# Altium PCB my-cnc_v2.PcbDoc
Units mm, origin at the board's own origin, x right, y up, seen from the top; angles counter-clockwise.
Board outline 65 x 100 mm, 2 copper layers (Top Layer, Bottom Layer); 47 components, 60 nets, 294 pads, 66 vias.
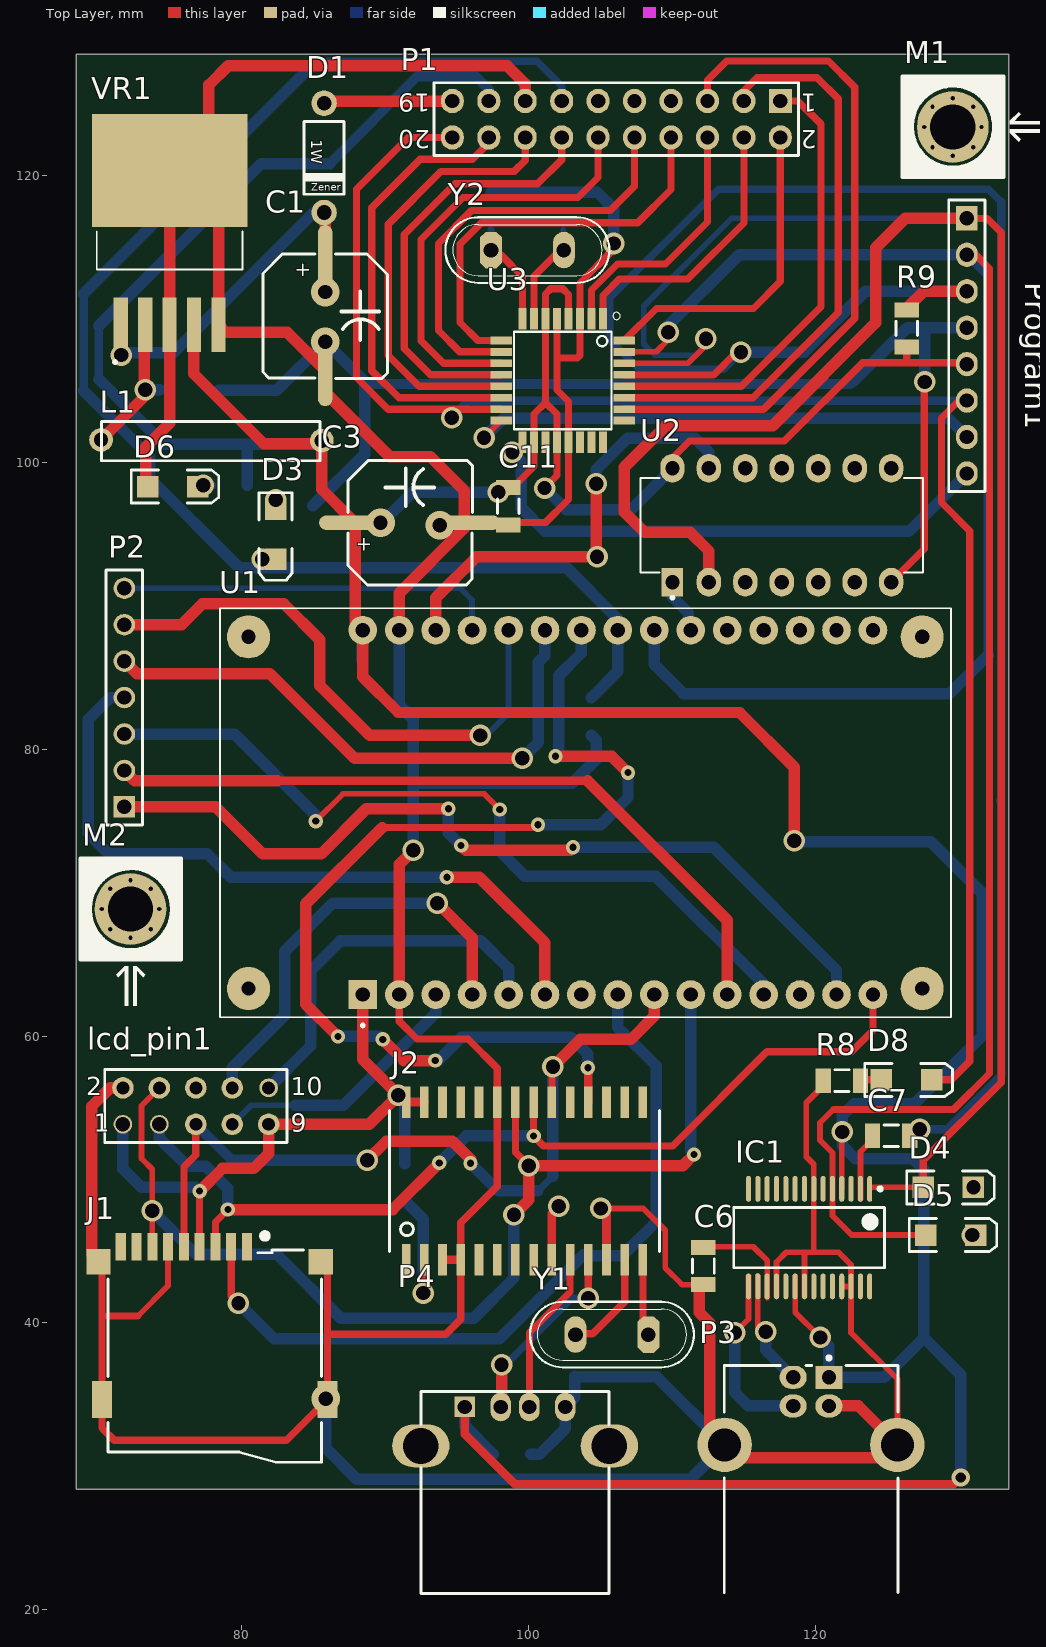
[diagram p0: Top Layer view]
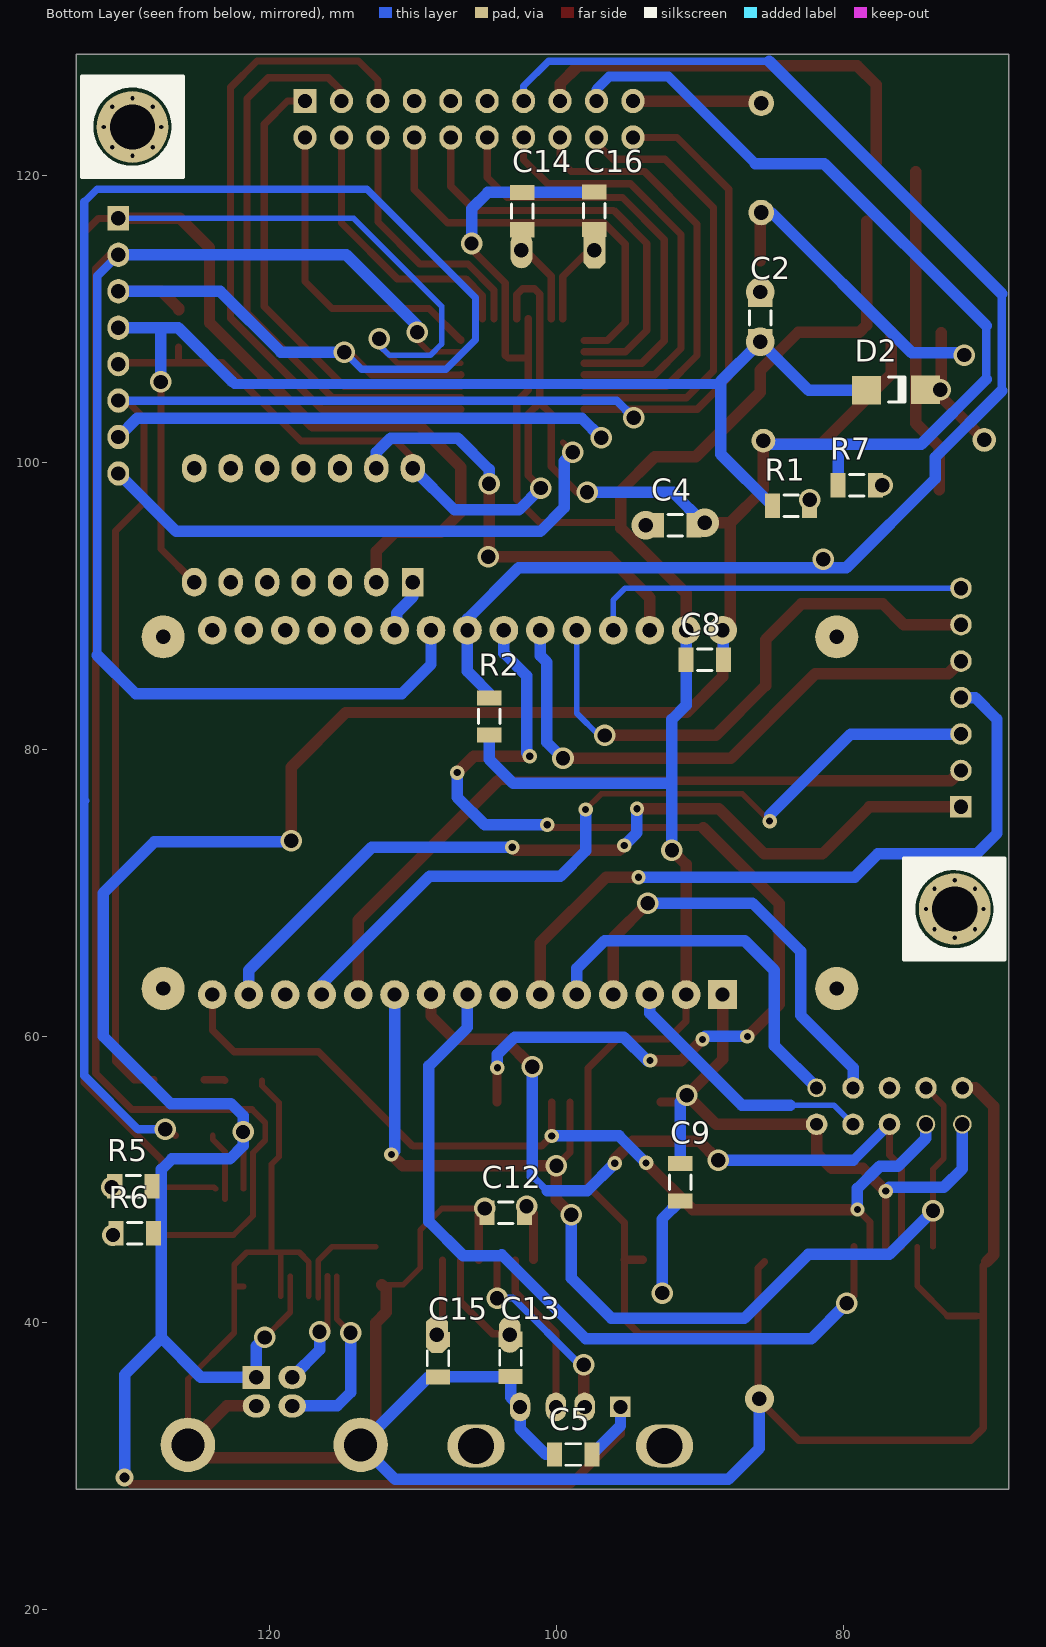
[diagram p1: Bottom Layer view, seen from below]
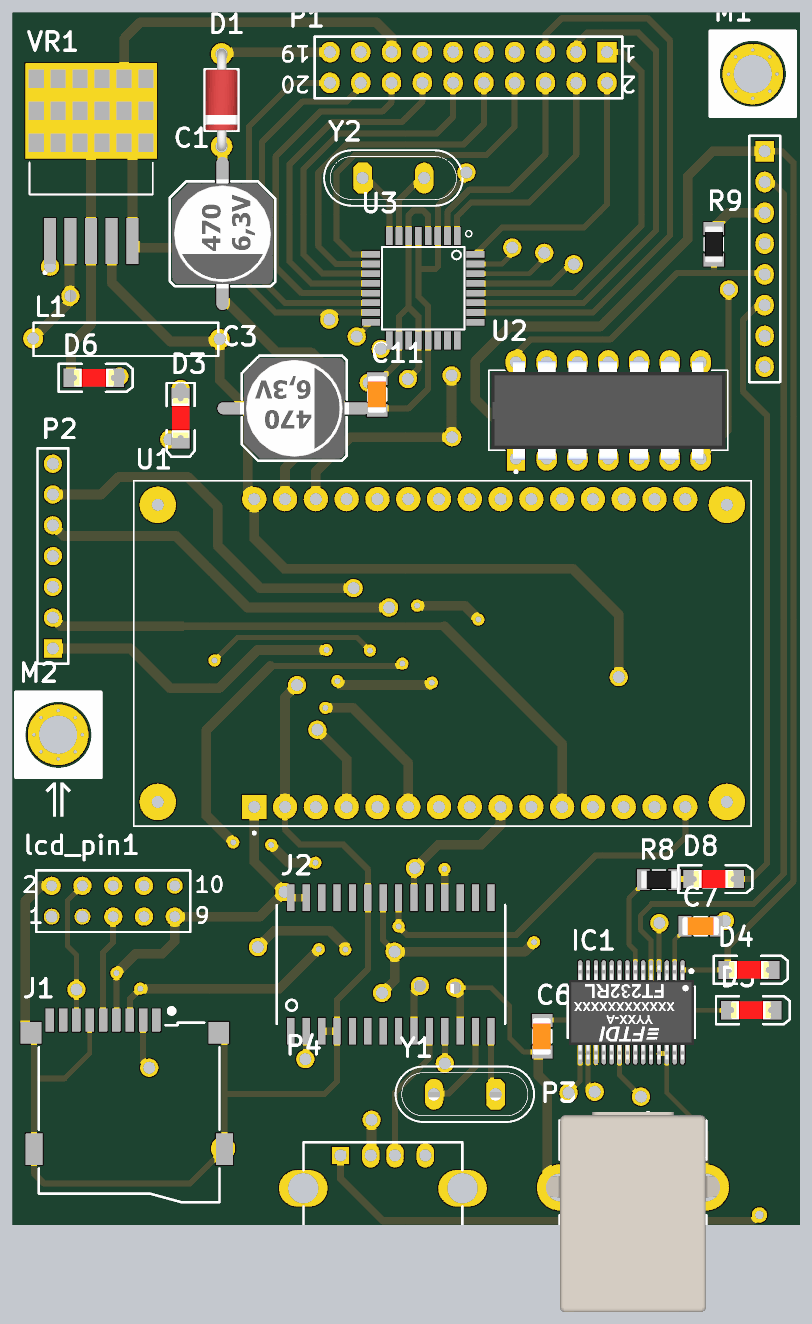
[diagram p2: 3D render of the assembled board from above, using the file's embedded part models]
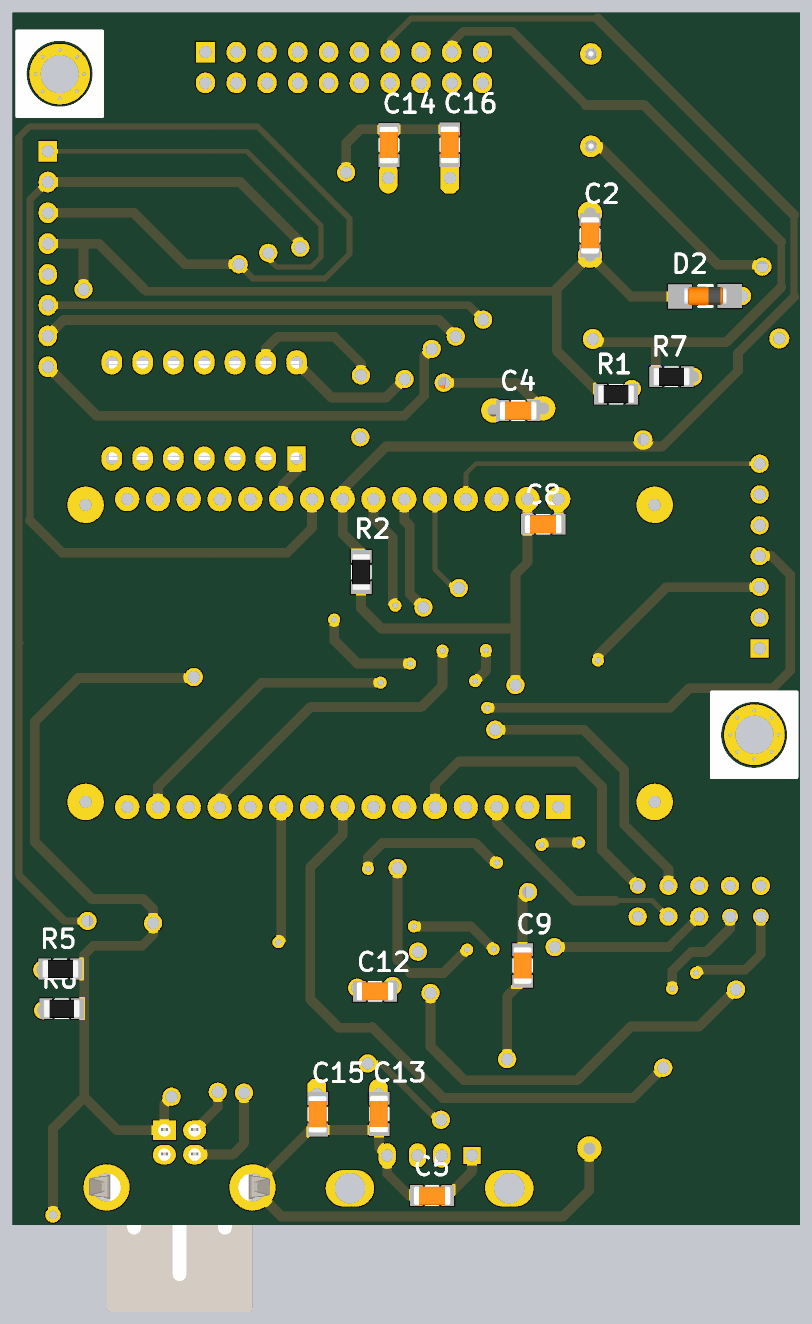
[diagram p3: 3D render of the assembled board from below, using the file's embedded part models]

## Layer stack, top to bottom
Top Solder: solder mask 0.0102, Solder Resist, Dk 3.5
Top Layer: signal copper 0.0356
Dielectric 1: dielectric 0.32, FR-4, Dk 4.8
Bottom Layer: signal copper 0.0356
Bottom Solder: solder mask 0.0102, Solder Resist, Dk 3.5

## Board outline
68.46,28.422 133.46,28.422 133.46,128.422 68.46,128.422

## Design rules (kind name [scope] priority, off if disabled: settings)
Clearance [All] p1: gap=0.2 ignorepadtopadclearanceinfootprint=FALSE
PolygonConnect [All] p1: connectstyle=Relief reliefconductorwidth=0.254 reliefentries=4 polygonreliefangle="90 Angle" airgapwidth=0.254
RoutingVias [All] p1: holewidth=0.711 width=1.27 viastyle="Through Hole" minholewidth=0.711 minwidth=1.27 maxholewidth=0.711 maxwidth=1.27
SolderMaskExpansion [All] p1: expansion=0.102
Width [All] p1: maxlimit=0.8 minlimit=0.4 preferedwidth=0.5
30 further rules are at their usual default settings.

## Components (designator, comment, footprint, x,y, rotation, side; value= is the part's Value field where it differs from the comment)
C1 "1uF" "CAP SMD 470uF" 85.801,110.211 r90 top
C2 "100nF" SMD_CAP_1206 85.801,108.758 r90 bottom
C3 "1uF" "CAP SMD 470uF" 91.694,95.783 r180 top
C4 "100nF" SMD_CAP_1206 93.02,95.606 r180 bottom
C5 "100nF" SMD_CAP_1206 100.127,30.836 r180 bottom
C6 "100nF" SMD_CAP_1206 112.166,45.268 r270 top
C7 "100nF" SMD_CAP_1206 126.548,53.061 r180 top
C8 "100nF" SMD_CAP_1206 90.963,86.233 r180 bottom
C9 "100nF" SMD_CAP_1206 91.364,48.514 r90 bottom
C11 "100nF" SMD_CAP_1206 98.552,98.227 r270 top
C12 "100nF" SMD_CAP_1206 102.235,47.676 r0 bottom
C13 "100nF" SMD_CAP_1206 103.2,38.867 r270 bottom
C14 "100nF" SMD_CAP_1206 102.387,118.796 r270 bottom
C15 "100nF" SMD_CAP_1206 108.255,38.842 r270 bottom
C16 "100nF" SMD_CAP_1206 97.358,118.821 r270 bottom
D1 "Diode Zener" "Diode 1W" 85.725,121.209 r270 top
D2 "1N4148" "Diode 1n4148 SMD" 77.902,105.054 r180 bottom
D3 "SMD 1206 LED" "LED 1206" 82.347,94.971 r270 top
D4 "SMD 1206 LED" "LED 1206" 129.235,49.454 r0 top
D5 "SMD 1206 LED" "LED 1206" 129.413,46.126 r0 top
D6 "SMD 1206 LED" "LED 1206" 75.184,98.298 r0 top
D8 "SMD 1206 LED" "LED 1206" 126.314,56.947 r0 top
IC1 "FT232RL" SSOP-28_L 119.532,45.949 r270 top
J1 "693071020811" 693071020811 78.102,34.265 r0 top
J2 "CH376S" SOP28 98.425,49.899 r0 top
L1 "Inductor Iron" AXIAL-0.9 77.826,101.498 r0 top value=10mH
lcd_pin1 "Header 5X2" HDR2X5 71.704,53.848 r0 top
M1 "Screw" "Board Screw" 129.548,123.36 r90 top
M2 "Screw" "Board Screw" 72.238,68.853 r0 top
P1 "Header 10X2" HDR2X10 117.526,125.171 r180 top
P2 "Header 7" HDR1X7 71.806,75.971 r90 top
P3 "USB Connector" USB2.5-2H4F 120.915,36.214 r270 top
P4 "USB-A1HSW6" OST_USB-A1HSW6 99.035,27.635 r0 top
Program1 "Header 8" HDR1X8 130.531,116.992 r270 top
R1 "1K" "RES 1206 (3216X08L)" 82.347,96.952 r0 bottom
R2 "1K" "RES 1206 (3216X08L)" 104.673,80.975 r90 bottom
R5 "1K" "RES 1206 (3216X08L)" 128.189,49.53 r0 bottom
R6 "1K" "RES 1206 (3216X08L)" 128.087,46.253 r0 bottom
R7 "1K" "RES 1206 (3216X08L)" 80.371,98.4 r180 bottom
R8 "1K" "RES 1206 (3216X08L)" 120.518,56.896 r0 top
R9 "1K" "RES 1206 (3216X08L)" 126.34,108.021 r90 top
U1 "ESP32-DEVKIT-V1" MODULE_ESP32_DEVKIT_V1 103.937,75.59 r90 top
U2 "CD4066BE" DIP794W45P254L1969H508Q14 117.627,95.606 r90 top
U3 "ATMEGA328P-15AZ" QFP80P900X900X120-32N 102.362,105.689 r270 top
VR1 "LM2596S-5.0" TO170P1524X483-6N 74.957,115.976 r90 top
Y1 "6 MHz" My_Crystal 105.791,39.192 r180 top
Y2 "6 MHz" My_Crystal 99.898,114.783 r0 top

## Footprints (in the part's own frame and the unit in brackets; to place one, negate y for a bottom-side part, rotate by r counter-clockwise, add the part's x,y. Pads: shape width x height; smd on the part's side, far side on the other; paste and mask are expansions set on the pad)
693071020811 [mm]
  rect 0.7x1.9 smd: 1(2.25,11.05) 2(1.15,11.05) 3(0.05,11.05) 4(-1.05,11.05) 5(-2.15,11.05) 6(-3.25,11.05) 7(-4.35,11.05) 8(-5.45,11.05) 9(-6.55,11.05)
  rect 1.7x1.8 smd: 10(-8.1,10) 11(7.4,10)
  rect 1.4x2.6 smd: 12(-7.85,0.4) 13(7.85,0.4)
  silkscreen extent -7.45,-3.97 7.45,12
AXIAL-0.9 [mm] "Axial Device, Thru-Hole; 2 Leads; 0.9 in Pin Spacing"
  round 1.65 hole 1: 1(-7.645,0.051) 2(7.747,0)
  silkscreen extent -7.62,-1.4 7.62,1.35
"Board Screw" [mm]
  round 0.6 hole 0.3: S(-2,0) S(-1.414,-1.414) S(-1.414,1.414) S(0,2) S(0,-2) S(1.414,-1.414) S(1.414,1.414) S(2,0)
  round 5 hole 3.15 mask+0.1: S(0,0)
  silkscreen extent -3.49,-6.75 3.56,3.52
"CAP SMD 470uF" [mm] "SMD CAP 470uF"
  oval 5x1 smd: 1(3.81,0) 2(-3.81,0)
  silkscreen extent -4.37,-4.34 4.29,4.34, body extent -4.53,-4.15 4.47,4.15, height 12
"Diode 1n4148 SMD" [mm] "Mini MELF SOD-80"
  rect 2x2 smd: 1(-0.483,-0.051) 2(3.632,0)
  silkscreen extent 1.04,-0.87 2.22,0.88, body extent -0.13,-0.75 3.37,0.75, height 1.55
"Diode 1W" [mil]
  round 70 hole 40: 1(-150,0) 2(150,0)
  silkscreen extent -100,-55 100,55, body extent -166,-53 165,53, height 131
DIP794W45P254L1969H508Q14 [mm]
  rect 2x1.5 hole 1: 1(-3.97,7.62)
  oval 2x1.7 hole 1: 2(-3.97,5.08) 3(-3.97,2.54) 4(-3.97,0) 5(-3.97,-2.54) 6(-3.97,-5.08) 7(-3.97,-7.62) 8(3.97,-7.62) 9(3.97,-5.08) 10(3.97,-2.54) 11(3.97,0) 12(3.97,2.54) 13(3.97,5.08) 14(3.97,7.62)
  silkscreen extent -5.15,-9.84 3.3,9.84, body extent -4.1,-9.65 4.1,9.65, height 5.08
HDR1X7 [mm] "Connector; Header; 7 Position"
  rect 1.5x1.5 hole 1: 1(0,0)
  round 1.5 hole 1: 2(2.54,0) 3(5.08,0) 4(7.62,0) 5(10.16,0) 6(12.7,0) 7(15.24,0)
  silkscreen extent -1.27,-1.27 16.51,1.27
HDR1X8 [mm] "Connector; Header; 8 Position"
  rect 1.7x1.5 hole 1: 1(0,0)
  oval 1.7x1.5 hole 1: 2(2.54,0) 3(5.08,0) 4(7.62,0) 5(10.16,0) 6(12.7,0) 7(15.24,0) 8(17.78,0)
  silkscreen extent -1.27,-1.27 19.05,1.27
HDR2X5 [mm] "Connector; Header; 5x2 Position"
  round 1.3 hole 1: 1(0,0) 3(2.54,0)
  round 1.5 hole 0.9: 2(0,2.54) 4(2.54,2.54) 5(5.08,0) 6(5.08,2.54) 7(7.62,0) 8(7.62,2.54) 9(10.16,0)
  round 1.3 hole 0.9: 10(10.16,2.54)
  silkscreen extent -1.27,-1.27 11.43,3.81
HDR2X10 [mm] "Connector; Header; 10x2 Position"
  rect 1.6x1.7 hole 1: 1(0,0)
  oval 1.6x1.7 hole 1: 2(0,2.54) 3(2.54,0) 4(2.54,2.54) 5(5.08,0) 6(5.08,2.54) 7(7.62,0) 8(7.62,2.54) 9(10.16,0) 10(10.16,2.54) 11(12.7,0) 12(12.7,2.54) 13(15.24,0) 14(15.24,2.54) 15(17.78,0) 16(17.78,2.54) 17(20.32,0) 18(20.32,2.54) 19(22.86,0) 20(22.86,2.54)
  silkscreen extent -1.27,-1.27 24.13,3.81
"LED 1206" [mm]
  rect 1.5x1.5 smd: 1(-1.75,0) 2(1.75,0)
  silkscreen extent -2.9,-1.15 3.2,1.15, body extent -1.65,-0.72 1.65,0.73, height 1.36
MODULE_ESP32_DEVKIT_V1 [mm]
  rect 2x2 / inner round 2 / far side rect 2x2 hole 1: 1(-12.7,15.515)
  round 2 hole 1: 2(-12.7,12.975) 3(-12.7,10.435) 4(-12.7,7.895) 5(-12.7,5.355) 6(-12.7,2.815) 7(-12.7,0.275) 8(-12.7,-2.265) 9(-12.7,-4.805) 10(-12.7,-7.345) 11(-12.7,-9.885) 12(-12.7,-12.425) 13(-12.7,-14.965) 14(-12.7,-17.505) 15(-12.7,-20.045) 16(12.7,-20.045) 17(12.7,-17.505) 18(12.7,-14.965) 19(12.7,-12.425) 20(12.7,-9.885) 21(12.7,-7.345) 22(12.7,-4.805) 23(12.7,-2.265) 24(12.7,0.275) 25(12.7,2.815) 26(12.7,5.355) 27(12.7,7.895) 28(12.7,10.435) 29(12.7,12.975) 30(12.7,15.515)
  round 3 hole 1 unplated: ""(-12.28,23.475) ""(-12.28,-23.475) ""(12.23,23.475) ""(12.23,-23.475)
  silkscreen extent -14.95,-25.48 14.23,25.48
My_Crystal [mil]
  oct 60x100 hole 40: 1(-100,0)
  oval 60x100 hole 40: 2(100,0)
  silkscreen extent -225,-90 225,90
OST_USB-A1HSW6 [mm]
  rect 1.428x1.428 / inner round 1.428 / far side rect 1.428x1.428 hole 1: 1(-3.5,6.51)
  oval 1.428x2 hole 1: 2(-1,6.51) 3(1,6.51) 4(3.5,6.51)
  oval 4x3 hole 2.5 unplated: ""(-6.57,3.8) ""(6.57,3.8)
  silkscreen extent -6.55,-6.5 6.55,7.6
QFP80P900X900X120-32N [mm]
  rect 1.5x0.55 smd: 1(-4.3,2.8) 2(-4.3,2) 3(-4.3,1.2) 4(-4.3,0.4) 5(-4.3,-0.4) 6(-4.3,-1.2) 7(-4.3,-2) 8(-4.3,-2.8) 17(4.3,-2.8) 18(4.3,-2) 19(4.3,-1.2) 20(4.3,-0.4) 21(4.3,0.4) 22(4.3,1.2) 23(4.3,2) 24(4.3,2.8)
  rect 0.55x1.5 smd: 9(-2.8,-4.3) 10(-2,-4.3) 11(-1.2,-4.3) 12(-0.4,-4.3) 13(0.4,-4.3) 14(1.2,-4.3) 15(2,-4.3) 16(2.8,-4.3) 25(2.8,4.3) 26(2,4.3) 27(1.2,4.3) 28(0.4,4.3) 29(-0.4,4.3) 30(-1.2,4.3) 31(-2,4.3) 32(-2.8,4.3)
  silkscreen extent -4.75,-3.4 3.4,4
"RES 1206 (3216X08L)" [mm] "Chip Resistor, 2-Leads, Body 3.2x1.6mm, IPC High Density _ (0.125 W)"
  rect 1.05x1.7 smd: 1(0,0) 2(2.596,0)
  silkscreen extent 0.8,-0.75 1.8,0.75, body extent -0.23,-0.76 2.82,0.76, height 0.6
SMD_CAP_1206 [mm]
  rect 1.05x1.7 smd: 1(0,0) 2(2.596,0)
  silkscreen extent 0.8,-0.75 1.8,0.75, body extent -0.22,-0.77 2.82,0.75, height 0.75
SOP28 [mm]
  rect 0.6x2.2 smd: 1(-6.985,-5.5) 2(-5.715,-5.5) 3(-4.445,-5.5) 4(-3.175,-5.5) 5(-1.905,-5.5) 6(-0.635,-5.5) 7(0.635,-5.5) 8(1.905,-5.5) 9(3.175,-5.5) 10(4.445,-5.5) 11(5.715,-5.5) 12(6.985,-5.5) 13(8.255,-5.5) 14(9.525,-5.5) 15(9.525,5.5) 16(8.255,5.5) 17(6.985,5.5) 18(5.715,5.5) 19(4.445,5.5) 20(3.175,5.5) 21(1.905,5.5) 22(0.635,5.5) 23(-0.635,5.5) 24(-1.905,5.5) 25(-3.175,5.5) 26(-4.445,5.5) 27(-5.715,5.5) 28(-6.985,5.5)
  silkscreen extent -8.15,-4.91 10.69,4.91
SSOP-28_L [mm] "SOP, 28-Leads, Body 10.2x5.3mm, Pitch 0.65mm, IPC High Density"
  oval 1.8x0.35 smd: 1(-3.4,4.225) 2(-3.4,3.575) 3(-3.4,2.925) 4(-3.4,2.275) 5(-3.4,1.625) 6(-3.4,0.975) 7(-3.4,0.325) 8(-3.4,-0.325) 9(-3.4,-0.975) 10(-3.4,-1.625) 11(-3.4,-2.275) 12(-3.4,-2.925) 13(-3.4,-3.575) 14(-3.4,-4.225) 15(3.4,-4.225) 16(3.4,-3.575) 17(3.4,-2.925) 18(3.4,-2.275) 19(3.4,-1.625) 20(3.4,-0.975) 21(3.4,-0.325) 22(3.4,0.325) 23(3.4,0.975) 24(3.4,1.625) 25(3.4,2.275) 26(3.4,2.925) 27(3.4,3.575) 28(3.4,4.225)
  silkscreen extent -3.52,-5.25 2.1,5.25, body extent -3.88,-5.17 3.88,5.17, height 2.16
TO170P1524X483-6N [mm]
  rect 3.79x0.99 smd: 1(-6.4,3.4) 2(-6.4,1.7) 3(-6.4,0) 4(-6.4,-1.7) 5(-6.4,-3.4)
  rect 7.88x10.84 smd paste-6: 6(4.35,0)
  silkscreen extent -9.1,-5.08 0.09,5.08
USB2.5-2H4F [mm] "Connector; USB1.1, Type B, Thru-Hole; 4 Position; Right Angle"
  rect 1.6x1.9 hole 1: 1(0,0)
  oval 1.6x1.9 hole 1: 2(0,-2.5) 3(2,-2.5) 4(2,0)
  round 3.8 hole 2.3: 4(4.71,4.77) 4(4.71,-7.27)
  silkscreen extent -1.47,-7.3 14.99,4.8, body extent -1.5,-8.7 15,6.2, height 10.95

## Part data
C1 C3: library part "Cap ELECTROLITIC TOTAL SIZE", "Cap electrolitic radial", Data=16-12-2016, Designer="Abbas Basereh"
C2 C4 C5 C6 C7 C8 C9 C11 C12 C13 C14 C15 C16: library part Cap-Bipolar, "Bipolar Capacitor", Voltage=100V, Adding Date=1387/12/20, Designer="Saeid Jorablo", Organazation=ControTec
D1: "Zener Diode", Voltage="3.3 V", Company=E.P.I.L, Design Date=2011/11/02, Designer="Saeid Jorablo"
D2: library part "1N4148 SMD", "General Semicoductor"
D3 D4 D5 D6 D8: library part "LED SMD 1206"
IC1: "USB UART Asynchronous Serial Data Transfer Chip, SSOP-28, Tape and Reel", ComponentLink1Description="Manufacturer Link", ComponentLink1URL=http://www.ftdichip.com/Products/ICs/FT232R.htm, ComponentLink2Description=Datasheet, ComponentLink2URL=http://www.ftdichip.com/Support/Documents/DataSheets/ICs/DS_FT232R.pdf, DatasheetVersion="ver 2.07, Jul-2010", PackageDescription="28-Pin Small Outline Package 0.65 mm Pitch", PackageReference=SSOP-28, PackageVersion=2010, Published=19-Aug-2010, Publisher="Altium Limited"
J1: "9 (8 + 1) Position Card Connector Secure Digital - microSD™ Surface Mount, Right Angle Gold", Package=None, Check_prices=https://www.snapeda.com/parts/693071020811/Wurth+Electronics/view-part/?ref=eda, MF="Wurth Electronics", MP=693071020811, SnapEDA_Link=https://www.snapeda.com/parts/693071020811/Wurth+Electronics/view-part/?ref=snap
J2: "File manage control chip. Small outline package of 28-pin", Package=Package, Availability="Not in stock", Check_prices=https://www.snapeda.com/parts/CH376S/WCH/view-part/?ref=eda, MF=WCH, MP=CH376S, Price=None, SnapEDA_Link=https://www.snapeda.com/parts/CH376S/WCH/view-part/?ref=snap
L1: "Magnetic-Core Inductor", LatestRevisionDate=17-Jul-2002, LatestRevisionNote="Re-released for DXP Platform.", PackageDescription="Axial Device, Thru-Hole; 2 Leads; 0.9 in Pin Spacing", PackageReference=AXIAL-0.9, Published=24-Mar-1999, Publisher="Altium Limited"
lcd_pin1: "Header, 5-Pin, Dual row", LatestRevisionDate=17-Jul-2002, LatestRevisionNote="Re-released for DXP Platform.", Publisher="Altium Limited"
M1 M2: library part "Board Screw", "Board Screw With Spacer"
P1: "Header, 10-Pin, Dual row", LatestRevisionDate=17-Jul-2002, LatestRevisionNote="Re-released for DXP Platform.", Publisher="Altium Limited"
P2: "Header, 7-Pin", LatestRevisionDate=17-Jul-2002, LatestRevisionNote="Re-released for DXP Platform.", Publisher="Altium Limited"
P3: library part "USB B-Type", "USB Connector-B Type", Adding Date=10/26/2010
P4: "USB-A (USB TYPE-A) - Receptacle Connector 4 Position Through Hole, Right Angle", Package=None, Availability="In Stock", Check_prices=https://www.snapeda.com/parts/USB-A1HSW6/On+Shore+Technology+Inc./view-part/?ref=eda, MF="On Shore", MP=USB-A1HSW6, Price=None, Purchase-URL=https://pricing.snapeda.com/search/part/USB-A1HSW6/?ref=eda, SnapEDA_Link=https://www.snapeda.com/parts/USB-A1HSW6/On+Shore+Technology+Inc./view-part/?ref=snap
Program1: "Header, 8-Pin", LatestRevisionDate=17-Jul-2002, LatestRevisionNote="Re-released for DXP Platform.", Publisher="Altium Limited"
R1 R2 R5 R6 R7 R8 R9: library part Resistor, "Resistor", Power="1/8 W", Tolerance=5%
U1: "Dual core, Wi-Fi: 2.4 GHz up to 150 Mbits/s,BLE (Bluetooth Low Energy) and legacy Bluetooth, 32 bits, Up to 240 MHz", Package=None, Availability="Not in stock", Check_prices=https://www.snapeda.com/parts/ESP32-DEVKIT-V1/Do+it/view-part/?ref=eda, MF="Do it", MP=ESP32-DEVKIT-V1, Price=None, SnapEDA_Link=https://www.snapeda.com/parts/ESP32-DEVKIT-V1/Do+it/view-part/?ref=snap
U2: "10-pA on-state leakage current, 20-V, 1:1 (SPST), 4-channel analog switch", Package="PDIP-14 Texas Instruments", Availability="In Stock", Check_prices=https://www.snapeda.com/parts/CD4066BE/Texas+Instruments/view-part/?ref=eda, MF="Texas Instruments", MP=CD4066BE, Price=None, Purchase-URL=https://pricing.snapeda.com/search/part/CD4066BE/?ref=eda, SnapEDA_Link=https://www.snapeda.com/parts/CD4066BE/Texas+Instruments/view-part/?ref=snap
U3: "AVR Automotive, AEC-Q100, AVR® ATmega Microcontroller IC 8-Bit 16MHz 32KB _16K x 16_ FLASH 32-TQFP _7x7_", Package="TQFP-32 Microchip", Digi-Key_Part_Number=ATMEGA328P-15AZCT-ND, Digi-Key_Purchase_URL=https://www.digikey.com/product-detail/en/microchip-technology/ATMEGA328P-15AZ/ATMEGA328P-15AZCT-ND/2477177?utm_source=snapeda&utm_medium=aggregator&utm_campaign=symbol, MF=Microchip, MP=ATMEGA328P-15AZ, SnapEDA_Link=https://www.snapeda.com/parts/ATMEGA328P-15AZ/Microchip/view-part/1227234/?ref=snap
VR1: Package=None, Availability=Unavailable, MP=LM2596S-5.0, Price=None
Y1 Y2: library part CRYSTAL, "Crystal"

## Via types
v1: diameter 1.5, hole 1, Top Layer to Bottom Layer, 41 vias
v2: diameter 1, hole 0.5, Top Layer to Bottom Layer, 19 vias
v3: diameter 2, hole 1, Top Layer to Bottom Layer, 5 vias
v4: diameter 1.27, hole 0.711, Top Layer to Bottom Layer, 1 vias

## Nets (pads, with @x,y where several pads share a name; then routed paths per layer and width w, separated by ;. In a path a pad name is that pad's centre, name@x,y a point inside that pad or via, vN(x,y) a via of type N, cw(c..) or ccw(c..) an arc to the next point about the centre after c; other vN are vias at no path point)
3.3v: C9.2 J1.4 J2.27 J2.28 lcd_pin1.1 lcd_pin1.9 U1.1 | length 45.8
  Top Layer w0.4: v1(90.907,55.88) 91.387,55.399 J2.28
  Top Layer w0.5: J1.4 v2(77.052,49.188)
  Top Layer w0.6: J2.28 J2.27
  Top Layer w0.8: v2(77.052,49.188) 78.638,50.775 80.823,50.775 81.864,51.816 lcd_pin1.9 88.875,53.848 v1(90.907,55.88) 88.422,58.365 U1.1
  Bottom Layer w0.8: lcd_pin1.1 71.704,50.749 73,49.454 76.786,49.454 v2(77.052,49.188) ; v1(90.907,55.88) 91.364,55.423 C9.2
abort: P1.1 U3.28 | length 32.2
  Top Layer w0.5: U3.28 114.814,105.289 120.371,110.846 120.371,123.546 118.745,125.171 P1.1
buzzer: U1.7
cs-usb: J2.18 U1.24 | length 75.5
  Top Layer w0.4: v2(100.635,74.727) v2@100.838,74.524 ; v2(104.115,57.785) v2@104.14,57.76
  Top Layer w0.5: 89.764,74.524 v2@100.838,74.524
  Top Layer w0.6: J2.18 v2@104.14,57.76
  Top Layer w0.8: v2(86.69,59.969) 84.455,62.205 84.455,69.215 89.764,74.524 ; v2(89.814,59.766) 91.288,58.293 v2(93.472,58.293) ; v2(101.854,79.502) 105.766,79.502 v2(106.909,78.359)
  Bottom Layer w0.8: v2(86.69,59.969) 89.611,59.969 v2(89.814,59.766) ; v2(93.472,58.293) 93.675,58.293 95.301,59.919 102.921,59.919 104.115,58.725 v2(104.115,57.785) ; v2(100.635,74.727) 105.004,74.727 106.909,76.632 v2(106.909,78.359) ; v2(101.854,79.502) 102.083,79.731 102.083,85.115 103.662,86.695 U1.24
d5: J1.2 U1.8 | length 54.7
  Top Layer w0.5: J1.2 79.252,41.881 v1(79.756,41.377)
  Bottom Layer w0.8: v1(79.756,41.377) 82.245,38.887 97.942,38.887 103.797,44.742 103.861,44.679 106.502,44.679 108.89,47.066 108.89,57.912 106.202,60.6 U1.8
d12: P2.7 U1.27 | length 26.7
  Bottom Layer w0.4: P2.7 95.225,91.211 96.042,90.394 U1.27
d13: U1.28 U2.13 | length 31.1
  Top Layer w0.8: U1.28 93.502,90.555 96.342,93.396 v1(104.75,93.396) 104.699,93.447 v1(104.699,98.501)
  Bottom Layer w0.8: v1(104.699,98.501) 104.699,99.492 106.883,101.676 111.557,101.676 112.547,100.686 U2.13
d14: P2.6 U1.26 | length 39.5
  Top Layer w0.8: P2.6 75.794,88.671 77.241,90.119 82.931,90.119 85.42,87.63 85.42,84.43 88.9,80.95 v1(96.622,80.95)
  Bottom Layer w0.4: v1(96.622,80.95) 97.028,80.95 98.582,82.504 U1.26
d21: P2.2 U1.11 | length 51.5
  Top Layer w0.6: 82.448,77.8 104.089,77.8
  Top Layer w0.8: P2.2 72.517,77.8 82.448,77.8 ; 104.089,77.8 113.822,68.068 U1.11
d22: P2.1 U1.14 | length 59.8
  Top Layer w0.8: P2.1 78.181,75.971 81.458,72.695 85.522,72.695 88.671,75.844 v2(94.386,75.844) ; v2(95.275,73.279) 95.606,72.949 102.87,72.949 v2(103.073,73.152)
  Bottom Layer w0.8: v2(94.386,75.844) 94.386,74.168 v2(95.275,73.279) ; v2(103.073,73.152) 112.878,73.152 121.442,64.588 U1.14
d25: D3.2 P1.13 R2.2 U1.23 | length 99.5
  Bottom Layer w0.5: 85.166,127.94 100.559,127.94 102.286,126.213 P1.13
  Bottom Layer w0.6: 68.961,104.978 68.961,111.735
  Bottom Layer w0.8: 68.961,104.978 73.584,100.355 73.584,98.857 79.807,92.634 102.641,92.634 106.202,89.073 U1.23 106.202,85.425 R2.2@104.343,83.566 ; 68.961,111.735 85.166,127.94
  other v1: 81.41,93.221
d27: P2.5 U1.25 | length 40.1
  Top Layer w0.8: P2.5 72.682,85.255 81.953,85.255 87.859,79.35 v1(99.543,79.35)
  Bottom Layer w0.8: v1(99.543,79.35) 100.66,80.467 100.66,86.055 101.122,86.517 U1.25
d+: J2.10 P4.3 | length 11.4
  Top Layer w0.5: P4.3 100.035,39.329 102.87,42.164 J2.10
d-: J2.11 P4.2 | length 13.6
  Top Layer w0.5: v1(104.14,41.732) J2.11
  Top Layer w0.8: P4.2 98.095,34.205 v1(98.095,37.084)
  Bottom Layer w0.5: v1(98.095,37.084) 98.374,37.084 103.022,41.732 v1(104.14,41.732)
dir_x: P1.8 U3.9 | length 28.8
  Top Layer w0.5: U3.9 96.438,108.489 95.199,109.728 95.199,115.189 96.698,116.688 107.594,116.688 109.906,118.999 P1.8
dir_y: P1.10 U3.10 | length 29.8
  Top Layer w0.5: U3.10 95.18,107.689 93.701,109.169 93.701,115.24 96.012,117.551 105.689,117.551 107.366,119.228 P1.10
dir_z: P1.12 U3.11 | length 30.2
  Top Layer w0.5: U3.11 94.05,106.889 92.481,108.458 92.481,115.519 95.402,118.44 103.429,118.44 104.826,119.837 P1.12
enable: P1.14 U3.12 | length 30.1
  Top Layer w0.5: U3.12 93.148,106.089 91.313,107.925 91.313,115.875 94.844,119.405 100.609,119.405 102.286,121.082 P1.14
end_x: P1.16 U3.13 | length 30.9
  Top Layer w0.5: U3.13 92.348,105.289 90.195,107.442 90.195,116.586 93.878,120.269 98.984,120.269 99.746,121.031 P1.16
end_y: P1.18 U3.14 | length 31.6
  Top Layer w0.5: P1.18 97.206,122.25 96.063,121.107 92.431,121.107 89.052,117.729 89.052,106.375 90.938,104.489 U3.14
end_z: D8.2 P1.20 Program1.6 U3.15 | length 119.8
  Top Layer w0.5: P1.20 91.592,122.631 87.986,119.024 87.986,105.893 90.189,103.689 U3.15 ; D8.2 129.438,56.947 130.734,58.242 130.734,95.199 128.753,97.18 128.753,103.073 129.972,104.292 Program1.6
  Bottom Layer w0.6: v1(94.615,103.099) 95.809,104.292 Program1.6
GND: C1.2 C2.1 C3.2 C4.1 C5.1 C6.2 C8.1 C11.2 C12.2 C13.2 C14.1 C15.2 C16.1 D2.1 D6.1 IC1.7 IC1.18 IC1.21 IC1.25 IC1.26 J1.6 J1.10 J1.11 J1.12 J1.13 J2.3 J2.4 J2.12 J2.23 lcd_pin1.2 P1.15 P3.4 P4.4 Program1.4 R1.2 R2.1 R8.1 U1.2 U1.29 U2.7 U3.3 U3.5 U3.21 VR1.3 VR1.5 VR1.6 | length 502.9
  Top Layer w0.4: 70.252,40.488 70.714,40.488 ; 72.746,40.488 74.852,42.594 J1.6 ; v1@105.41,47.574 105.41,47.828 105.258,47.981 107.975,47.981 109.499,46.457 109.499,43.84 110.668,42.672 C6.2 ; IC1.18@117.257,41.885 117.257,44.258 117.932,44.933 119.202,44.933 ; IC1.21@119.207,41.859 119.207,44.927 119.202,44.933 ; R8.1 120.518,56.535 119.329,55.347 119.329,51.587 119.857,51.059 IC1.7 119.857,44.989 119.913,44.933 ; IC1.25 IC1.26 ; P3.4@125.685,31.504 125.685,36.088 122.457,39.315 IC1.26 ; 119.202,44.933 119.913,44.933 ; 119.913,44.933 121.59,44.933 122.457,44.065 IC1.26
  Top Layer w0.5: J1.10 70.252,44.015 70.252,40.488 J1.12 70.252,32.669 71.095,31.826 83.114,31.826 J1.13@85.931,34.643 ; 70.714,40.488 72.746,40.488 ; J1.11 85.952,43.815 85.952,39.218 ; J1.13@85.952,34.722 85.952,39.218 ; U1.2 90.962,61.032 92.202,59.792 95.758,59.792 97.79,57.76 J2.23 97.79,49.53 95.25,46.99 J2.4 95.25,40.259 94.209,39.218 85.952,39.218 ; C3.2 101.143,95.783 102.762,97.403 U3.21 102.762,104.223 101.962,105.023 101.962,107.264 ; U3.5 101.962,107.264 ; v1(105.004,47.981) v1@105.41,47.574 ; v1(105.918,115.24) 105.918,114.833 103.562,112.477 U3.3 103.562,107.448 103.378,107.264 101.962,107.264 ; U2.7 127.559,93.947 127.559,105.562 v1(127.584,105.588)
  Top Layer w0.6: J2.3 J2.4 ; J2.12 v1@105.41,47.574
  Top Layer w0.8: J1.10 69.52,44.747 69.52,55.093 70.815,56.388 lcd_pin1.2 ; D6.1@73.304,98.069 73.304,101.067 74.957,102.719 VR1.3 ; VR1.3@74.955,109.5 VR1.6@74.955,120.25 ; VR1.6@77.699,120.885 77.699,126.289 79.045,127.635 98.476,127.635 99.746,126.365 P1.15 ; VR1.5 VR1.5@78.381,109.552 ; VR1.6@78.381,116.774 VR1.5@78.381,109.552 ; U1.2 90.962,71.963 v1(91.948,72.949) ; U1.29 90.962,90.86 95.504,95.402 C3.2 95.504,98.019 93.142,100.381 90.297,100.381 85.801,104.877 C1.2 83.16,109.042 78.891,109.042 VR1.5@78.381,109.552 ; C6.2 111.862,42.367 111.862,40.742 112.598,40.005 112.598,32.55 113.645,31.504 112.748,30.607 113.652,30.614 113.721,30.615 P3.4@125.761,30.615 ; P3.4@120.915,34.214 122.975,34.214 P3.4@125.685,31.504
  Bottom Layer w0.4: C16.1 C16.1@97.384,118.796
  Bottom Layer w0.5: C4.1 v3(93.777,95.606) ; 122.428,105.435 122.618,105.626
  Bottom Layer w0.7: 88.544,105.435 122.428,105.435
  Bottom Layer w0.8: D2.1 82.423,105.004 v3(85.801,108.382) 88.544,105.639 88.544,105.435 88.544,100.553 R1.2 ; v3(85.852,34.722) 85.852,31.267 88.011,29.108 111.249,29.108 113.645,31.504 108.903,36.246 C15.2 103.226,36.246 C13.2 103.2,34.811 P4.4 102.535,32.634 100.736,30.836 C5.1 ; U1.29 90.962,83.054 91.948,82.067 91.948,77.622 ; v1(91.948,72.949) 91.948,77.622 ; C16.1@97.384,118.796 C14.1 104.775,118.796 105.918,117.653 v1(105.918,115.24) ; R2.1@104.343,80.97 104.699,80.614 104.699,79.299 103.022,77.622 91.948,77.622 ; 122.618,105.626 126.365,109.372 127.508,109.372 ; v1(127.584,105.588) 127.584,109.296 127.508,109.372 ; Program1.4 127.508,109.372
hold: P1.3 U3.27 | length 40.5
  Top Layer w0.5: U3.27 115.615,104.489 121.564,110.439 121.564,125.324 120.091,126.797 115.9,126.797 114.986,125.882 P1.3
lcd_cs: lcd_pin1.7 U1.3 | length 19.2
  Bottom Layer w0.4: lcd_pin1.7 80.645,55.169 83.718,55.169
  Bottom Layer w0.8: 83.718,55.169 87.071,55.169 93.502,61.599 U1.3 U1.3@93.167,62.556
lcd_miso: J1.7 J2.22 lcd_pin1.4 U1.10 | length 77.5
  Top Layer w0.4: J1.7 v1(73.752,47.828) 73.752,50.708 73,51.46 73,55.143 lcd_pin1.4
  Top Layer w0.5: J2.22 99.06,51.892 v1(100,50.952)
  Top Layer w0.8: v1(98.958,47.549) 100,48.59 v1(100,50.952) 110.719,50.952 v2(111.506,51.74)
  Bottom Layer w0.8: v1(73.752,47.828) 76.8,44.78 82.448,44.78 86.893,40.335 96.164,40.335 98.958,43.129 v1(98.958,47.549) ; U1.10 111.282,51.964 v2(111.506,51.74)
lcd_mosi: J1.3 J2.21 lcd_pin1.3 U1.15 | length 67.2
  Top Layer w0.5: J1.3 78.152,47.037 v2(79.019,47.904) ; J2.21 v2(100.33,53.035) 101.041,52.324 110.007,52.324 116.586,58.903 122.479,58.903 123.982,60.406 U1.15
  Top Layer w0.8: v2(79.019,47.904) 90.5,47.904 v2(93.751,51.156)
  Bottom Layer w0.8: lcd_pin1.3 74.244,52.883 76.2,50.927 77.47,50.927 79.019,49.378 v2(79.019,47.904) ; v2(93.751,51.156) 95.631,53.035 v2(100.33,53.035)
lcd_rs: lcd_pin1.8 U1.4 | length 30.4
  Top Layer w0.8: v1(93.624,69.266) 96.042,66.848 U1.4
  Bottom Layer w0.8: lcd_pin1.8 79.324,57.785 82.982,61.443 82.982,65.913 86.335,69.266 v1(93.624,69.266)
lcd_sck: J1.5 J2.20 lcd_pin1.5 U1.9 | length 57.3
  Top Layer w0.5: J1.5 75.952,50.882 76.784,51.714 lcd_pin1.5 ; J2.20 v1@101.6,57.633
  Top Layer w0.8: v1(88.722,51.333) 90.068,52.68 94.666,52.68 95.936,51.41 v2(95.936,51.13) ; v1(101.676,57.861) 103.581,59.766 107.112,59.766 108.742,61.396 U1.9
  Bottom Layer w0.5: 100.635,49.2 101.676,50.241
  Bottom Layer w0.7: lcd_pin1.5 79.299,51.333
  Bottom Layer w0.8: 79.299,51.333 v1(88.722,51.333) ; v2(95.936,51.13) 97.866,49.2 100.635,49.2 ; 101.676,50.241 v1(101.676,57.861)
miso_m328: Program1.7 U3.16 | length 36.4
  Top Layer w0.4: v1(96.876,101.702) 96.876,101.703 U3.16
  Bottom Layer w0.8: v1(96.876,101.702) 98.247,103.073 129.21,103.073 Program1.7
NetC1_1: C1.1 C2.2 D1.2 VR1.1 | length 22.4
  Top Layer w0.8: D1.2@85.547,117.5 85.801,117.246 C1.1
  Bottom Layer w0.8: v1(71.577,107.467) 71.73,107.62 75.235,107.62 85.014,117.399 D1.2 ; C2.2 v3(85.801,111.862)
NetC6_1: C6.1 IC1.17 | length 7
  Top Layer w0.4: C6.1@112.598,45.319 115.641,45.319 116.607,44.352 IC1.17@116.607,41.783
NetC7_2: C7.2 IC1.2 | length 4.8
  Top Layer w0.4: IC1.2@123.107,48.641 123.107,51.937 123.952,52.781 C7.2
NetC9_1: C9.1 J2.2 | length 9.3
  Top Layer w0.5: v1(92.634,42.088) 92.71,42.164 J2.2
  Bottom Layer w0.8: C9.1 92.634,47.244 v1(92.634,42.088)
NetC12_1: C12.1 J2.9 | length 3.9
  Top Layer w0.4: v1@101.6,47.65 v1(102.083,48.133)
  Top Layer w0.6: J2.9 v1@101.6,47.65
NetC13_1: C13.1 J2.13 Y1.2 | length 7.3
  Top Layer w0.5: Y1.2 103.302,39.243 104.445,39.243 106.68,41.478 J2.13
NetC14_2: C14.2 U3.7 Y2.2 | length 7.4
  Top Layer w0.5: U3.7 100.362,112.96 101.829,114.427 Y2.2@102.413,114.427
  Bottom Layer w0.4: C14.2 102.387,114.452 Y2.2@102.413,114.427
NetC15_1: C15.1 J2.14 Y1.1 | length 5.4
  Top Layer w0.5: Y1.1@107.95,38.989 J2.14
NetC16_2: C16.2 U3.8 Y2.1 | length 7.6
  Top Layer w0.5: Y2.1@97.333,114.427 98.069,114.427 99.562,112.934 U3.8
  Bottom Layer w0.5: Y2.1@97.333,114.427 97.358,114.452 C16.2
NetD2_2: D2.2 L1.1 VR1.2 | length 9.2
  Top Layer w0.8: L1.1 v1@73.177,104.546 ; v1@73.177,105.054 VR1.2@73.177,109.016
  Bottom Layer w0.8: v1(73.254,105.054) D2.2
NetD3_1: D3.1 R1.1 | length 0.7
  Top Layer w0.8: D3.1 v1(82.347,97.384)
NetD4_2: D4.2 R5.2
  other v1: 130.985,49.454
NetD5_2: D5.2 R6.2 | length 0.3
  Top Layer w0.4: v1(130.912,46.126) D5.2
NetD6_2: D6.2 R7.2 | length 0.5
  Bottom Layer w0.8: v1(77.292,98.4) R7.2
NetD8_1: D8.1 R8.2 | length 1.5
  Top Layer w0.5: R8.2 123.165,56.947 D8.1
NetIC1_15: IC1.15 P3.3 | length 13
  Top Layer w0.4: v1(114.351,39.319) 115.307,40.276 IC1.15@115.307,43.256
  Bottom Layer w0.8: v1(114.351,39.319) 114.351,35.154 115.291,34.214 P3.3
NetIC1_16: IC1.16 P3.2 | length 8.4
  Top Layer w0.4: IC1.16@115.957,43.282 IC1.16 115.957,39.414 115.976,39.395 v1(116.51,39.395)
  Bottom Layer w0.8: v1(116.51,39.395) 116.51,38.119 P3.2
reset_m328: C7.1 Program1.3 R9.2 U3.29 | length 144.4
  Top Layer w0.5: U3.29 106.68,106.071 112.879,106.071 114.478,107.671 v1(114.783,107.671) ; C7.1 126.98,53.492 v1(127.254,53.492)
  Top Layer w0.8: R9.2 126.34,110.719 127.533,111.912 Program1.3
  Bottom Layer w0.5: v1(114.783,107.671) 113.589,106.477 107.696,106.477 105.639,108.534 105.639,111.455 113.208,119.024 132.029,119.024 132.918,118.135 ; 132.791,76.403 132.918,76.53
  Bottom Layer w0.6: v1(127.254,53.492) 129.159,53.492 132.918,57.252 132.918,76.53 132.918,118.135
  Bottom Layer w0.8: v1(114.783,107.671) 119.202,107.671 123.444,111.912 123.8,111.912 Program1.3
resume: P1.5 U3.26 | length 47.8
  Top Layer w0.5: U3.26 116.364,103.689 122.707,110.033 122.707,126.136 120.879,127.965 113.792,127.965 112.446,126.619 P1.5
rx2: P2.4 U1.6 | length 49.7
  Top Layer w0.8: v2(94.285,71.069) 96.545,71.069 101.122,66.493 U1.6
  Bottom Layer w0.8: P2.4 70.815,83.591 69.291,82.067 69.291,74.117 70.714,72.695 77.597,72.695 79.223,71.069 v2(94.285,71.069)
rx_m328: D4.1 IC1.1 Program1.1 U2.2 U3.30 | length 161.6
  Top Layer w0.4: U3.30 111.08,106.889 112.344,108.153 v1(112.344,108.61) ; IC1.1 123.863,49.454 D4.1
  Top Layer w0.5: D4.1 127.485,51.336 132.918,56.769 132.918,116.002 131.928,116.992 Program1.1
  Top Layer w0.8: U2.2 112.547,93.802 111.252,95.098 108.077,95.098 106.655,96.52 106.655,99.644 109.55,102.54 116.992,102.54 124.181,109.728 124.181,114.935 126.238,116.992 Program1.1
  Bottom Layer w0.4: v1(112.344,108.61) 112.344,108.153 111.633,107.442 108.788,107.442 108.001,108.229 108.001,110.871 114.122,116.992 Program1.1
rxd: P2.3 U1.12 | length 56
  Top Layer w0.4: v2(85.141,74.981) 87.039,76.879 96.882,76.879 v2(97.968,75.794)
  Bottom Layer w0.8: P2.3 71.831,81.026 79.502,81.026 85.141,75.387 v2(85.141,74.981) ; v2(97.968,75.794) 97.968,72.898 99.72,71.145 108.839,71.145 116.362,63.623 U1.12
sck_m328: Program1.8 U3.17 | length 38.5
  Top Layer w0.4: v1(98.857,100.684) U3.17
  Bottom Layer w0.8: v1(98.857,100.684) 99.466,100.075 99.466,96.825 101.117,95.174 126.492,95.174 Program1.8
step_x: P1.2 U3.32 | length 22.7
  Top Layer w0.4: U3.32@106.604,108.548 U3.32
  Top Layer w0.5: U3.32 108.891,110.719 115.646,110.719 117.526,112.598 P1.2
step_y: P1.4 U3.1 | length 19.5
  Top Layer w0.5: U3.1 105.162,111.614 106.324,112.776 111.1,112.776 114.986,116.662 P1.4
step_z: P1.6 U3.2 | length 18
  Top Layer w0.5: U3.2 104.362,112.007 106.172,113.817 109.525,113.817 112.446,116.738 P1.6
touch_cs: lcd_pin1.10 U1.5 | length 26.7
  Bottom Layer w0.8: lcd_pin1.10 84.811,59.334 84.811,64.592 86.868,66.65 96.647,66.65 98.582,64.715 U1.5
tx_esp: U1.21 U2.1 | length 3.9
  Bottom Layer w0.8: U2.1 110.007,90.602 111.125,89.484 111.125,88.925 111.282,88.769 U1.21
tx_m328: D5.1 IC1.5 Program1.2 U1.22 U3.31 | length 168.6
  Top Layer w0.4: U3.31 108.883,107.689 109.703,108.509 v1(109.703,109.042) ; 121.234,54.889 120.294,53.95 120.294,52.73 121.157,51.867 IC1.5 121.157,47.473 122.504,46.126 D5.1
  Top Layer w0.5: 121.234,54.889 129.616,54.889 132.105,57.379 132.105,113.487 131.14,114.452 Program1.2
  Bottom Layer w0.6: Program1.2 132.004,112.979 132.004,86.538
  Bottom Layer w0.8: U1.22 108.742,85.898 110.769,83.871 129.337,83.871 132.004,86.538 ; v1(109.703,109.042) 109.703,109.499 114.656,114.452 Program1.2
VCC: C3.1 C4.2 C5.2 C8.2 C11.1 IC1.4 IC1.20 L1.2 P1.17 P3.1 P4.1 Program1.5 R5.1 R6.1 R7.1 R9.1 U1.30 U2.14 U3.4 U3.6 U3.18 U3.20 VR1.4 | length 333.4
  Top Layer w0.4: IC1.20@118.557,43.256 118.557,40.751 v1(120.32,38.989) ; IC1.4 121.807,53.278 v1(121.844,53.315) ; 129.616,28.753 v4(130.099,29.235)
  Top Layer w0.5: v1(97.866,97.892) 98.552,97.892 100.362,99.702 U3.18 100.362,103.346 101.162,104.146 ; v1(101.092,98.196) 101.962,99.066 U3.20 101.962,103.346 101.162,104.146 ; U3.4 102.762,111.69 102.362,112.09 101.524,112.09 101.162,111.728 U3.6 101.162,104.146 ; U2.14 110.007,100.279 111.201,101.473 117.805,101.473 123.266,106.934 126.34,106.934 ; R9.1 126.34,106.934 ; Program1.5 130.429,106.934 126.34,106.934
  Top Layer w0.6: P4.1 95.535,32.253 99.035,28.753 129.616,28.753
  Top Layer w0.8: VR1.4@76.657,109.096 76.657,106.147 81.509,101.295 85.369,101.295 L1.2 85.573,98.095 C3.1 ; v3(89.662,95.783) C3.1 ; v1(118.491,73.609) 118.491,78.74 114.681,82.55 90.907,82.55 88.422,85.035 U1.30 87.884,88.828 C3.1
  Bottom Layer w0.6: 70.028,105.791 70.028,109.499
  Bottom Layer w0.7: 86.131,120.802 92.202,126.873 96.317,126.873 97.206,125.984 P1.17
  Bottom Layer w0.8: 70.028,105.791 74.574,101.244 80.594,101.244 ; 70.028,109.499 81.331,120.802 86.131,120.802 ; R7.1 80.371,101.021 80.594,101.244 ; L1.2 85.319,101.244 80.594,101.244 ; C8.2 88.367,88.235 U1.30 ; v3(89.662,95.783) 89.764,95.783 91.872,97.892 v1(97.866,97.892) ; P4.1 95.535,32.832 C5.2 ; v1(101.092,98.196) 102.616,96.672 107.104,96.672 U2.14 ; v1(118.491,73.609) 118.567,73.533 128.016,73.533 131.597,69.952 131.597,59.995 126.898,55.296 122.682,55.296 121.844,54.458 v1(121.844,53.315) 121.844,52.349 122.758,51.435 126.797,51.435 127.533,50.698 127.533,38.964 ; v1(120.32,38.989) 120.915,38.394 P3.1 124.784,36.214 127.533,38.964 ; v4(130.099,29.235) 130.099,36.398 127.533,38.964
vin: D1.1 P1.19 | length 9.3
  Top Layer w0.8: D1.1@85.674,124.993 85.547,125.12 85.598,125.171 P1.19
pads on no net: IC1.3 IC1.6 IC1.8 IC1.9 IC1.10 IC1.11 IC1.12 IC1.13 IC1.14 IC1.19 IC1.22 IC1.23 IC1.24 IC1.27 IC1.28 J1.1 J1.8 J1.9 J2.1 J2.5 J2.6 J2.7 J2.8 J2.15 J2.16 J2.17 J2.19 J2.24 J2.25 J2.26 lcd_pin1.6 M1.S M2.S P1.7 P1.9 P1.11 P4. U1. U1.13 U1.16 U1.17 U1.18 U1.19 U1.20 U2.3 U2.4 U2.5 U2.6 U2.8 U2.9 U2.10 U2.11 U2.12 U3.19 U3.22 U3.23 U3.24 U3.25

## Silkscreen, mask and mechanical layers (free items; w line width, h text height)
Mechanical 2:
  the board outline again, w0.1

## Text inside footprints (layer, text, board x,y; h text height)
C1: Top Overlay "+" at 84.701,112.811 h1 r90
C3: Top Overlay "+" at 89.094,94.683 h1 r180
D1: Top Overlay "Zener" at 84.836,118.923 h0.5; Top Overlay "1W" at 84.836,122.479 h0.76 r270
lcd_pin1: Top Overlay "10" at 83.388,55.88 h1.27; Top Overlay "9" at 83.388,53.34 h1.27; Top Overlay "1" at 69.672,53.34 h1.27; Top Overlay "2" at 69.164,55.88 h1.27
P1: Top Overlay "20" at 93.142,123.139 h1.27 r180; Top Overlay "19" at 93.142,125.679 h1.27 r180; Top Overlay "1" at 120.066,125.679 h1.27 r180; Top Overlay "2" at 120.066,123.139 h1.27 r180
P3: Mechanical 1 "PCB Edge" at 114.013,21.529 h0.25